# Altium PCB FBA_PCB.PcbDoc
Units mil, origin at the board's own origin, x right, y up, seen from the top; angles counter-clockwise.
Board outline 3031.5 x 2480.31 mil, 2 copper layers (Top Layer, Bottom Layer); 1 components, 3 nets, 15 pads, 0 vias.
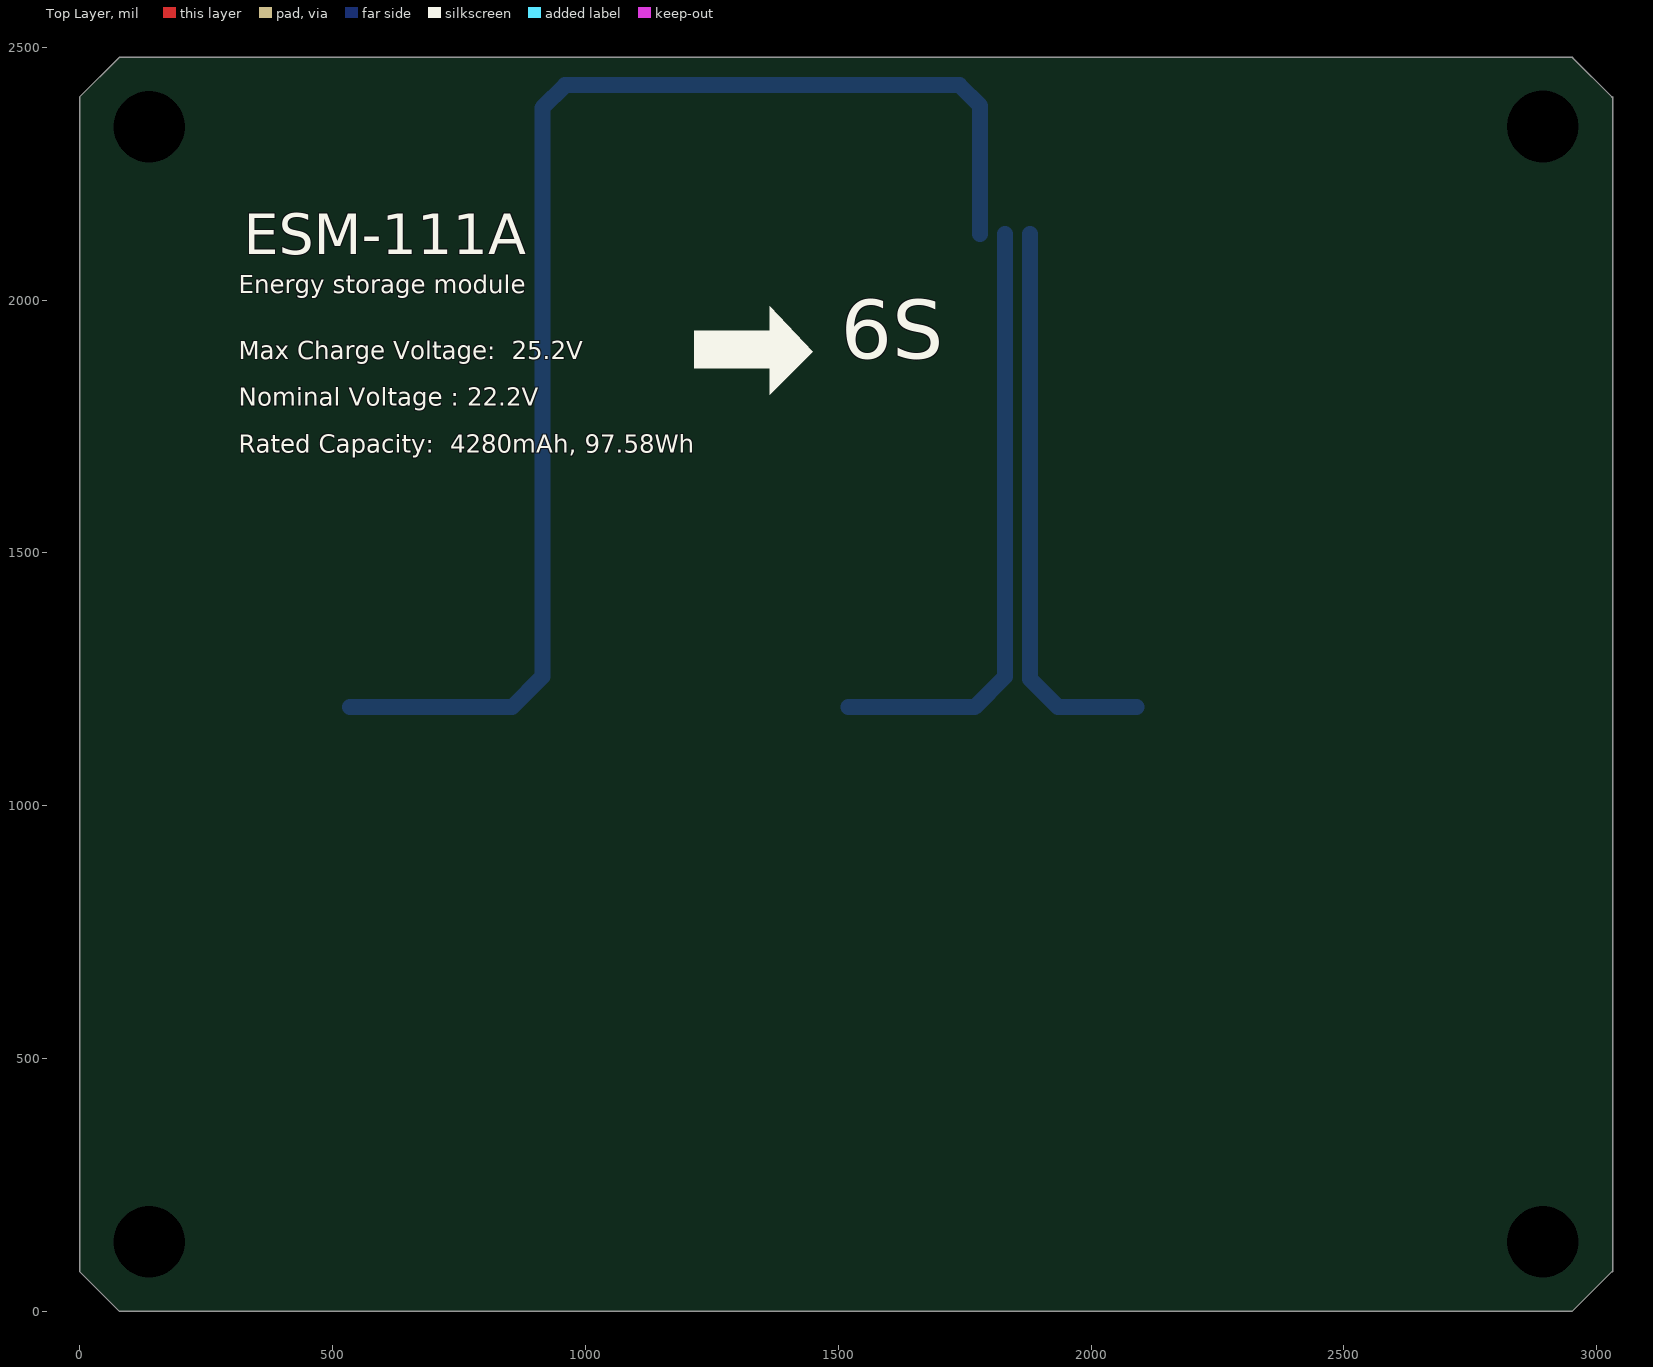
[diagram p0: Top Layer view]
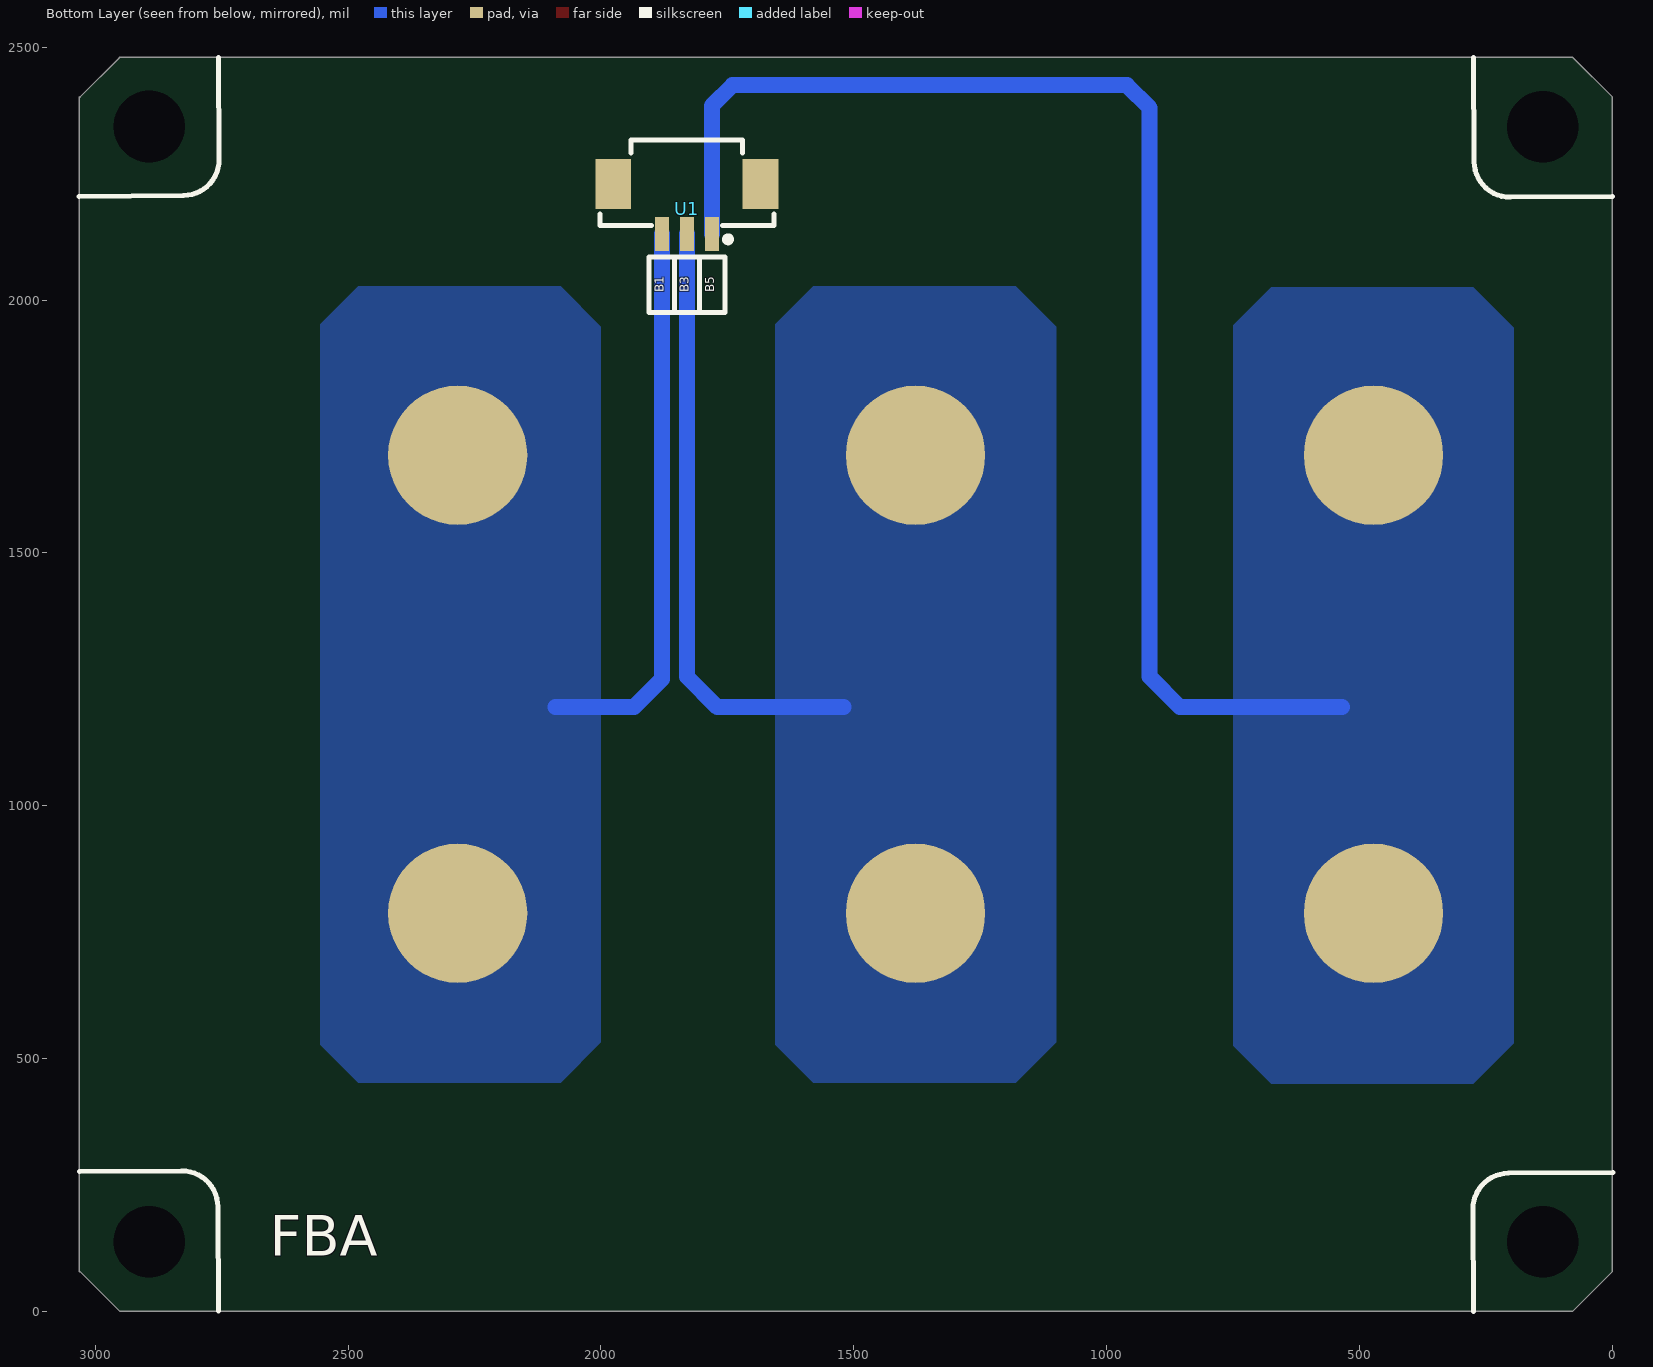
[diagram p1: Bottom Layer view, seen from below]

## Layer stack, top to bottom
Top Solder: solder mask 0.4, Solder Resist, Dk 3.5
Top Layer: signal copper 1.4
Dielectric 1: dielectric 12.6, FR-4, Dk 4.8
Bottom Layer: signal copper 1.4
Bottom Solder: solder mask 0.4, Solder Resist, Dk 3.5

## Board outline
0,78.74 78.74,0 2951.26,0 3030,78.74 3031.5,78.74 3031.5,2401.57 3030,2401.26 2951.26,2480 2952.76,2480.31 78.74,2480.31 78.74,2480 0,2401.26

## Design rules (kind name [scope] priority, off if disabled: settings)
Clearance [All] p1: gap=10 ignorepadtopadclearanceinfootprint=FALSE
PolygonConnect [All] p1: connectstyle=Direct reliefconductorwidth=10 reliefentries=4 polygonreliefangle="90 Angle" airgapwidth=10
RoutingVias [All] p1: holewidth=28 width=50 viastyle="Through Hole" minholewidth=28 minwidth=50 maxholewidth=28 maxwidth=50
SolderMaskExpansion [All] p1: expansion=4 istentingtop=FALSE
Width [All] p1: maxlimit=31.5 minlimit=10 preferedwidth=10
30 further rules are at their usual default settings.

## Components (designator, comment, footprint, x,y, rotation, side; value= is the part's Value field where it differs from the comment)
U1 "ZX-MX1.25-3PWT" CONN-SMD_3P-P1.25_MEGASTAR_ZX-MX1.25-3PWT 1830,2180 r0 bottom

## Footprints (in the part's own frame and the unit in brackets; to place one, negate y for a bottom-side part, rotate by r counter-clockwise, add the part's x,y. Pads: shape width x height; smd on the part's side, far side on the other; paste and mask are expansions set on the pad)
CONN-SMD_3P-P1.25_MEGASTAR_ZX-MX1.25-3PWT [mm]
  rect 0.7x1.7 smd paste+0 mask+0.05: 1(-1.25,1.25) 2(0,1.25) 3(1.25,1.25)
  rect 1.8x2.5 smd paste+0 mask+0.05: 4(-3.7,-1.25) 5(3.7,-1.25)
  silkscreen extent -4.37,-3.47 4.37,1.67

## Part data
U1: library part CMP-010-000000-1, Color=Beige, Current Rating=1A, Flame Retardant Rating=-, JLCPCB Part Class="Extended Part", LCSC Part Name="1x3P 间距:1.25mm 卧贴 系列:PicoBlade(MX 1.25)", Manufacturer=Megastar(兆星), Operating Temperature=-25℃~+85℃, Voltage Rating=125V, Add into BOM=yes, Contact Material=Brass, Contact Plating=Tin, Convert to PCB=yes, Datasheet=https://item.szlcsc.com/datasheet/ZX-MX1.25-3PWT/8430338.html, Design Item ID=ZX-MX1.25-3PWT, Device=ZX-MX1.25-3PWT, Manufacturer Part=ZX-MX1.25-3PWT, Mounting Type="Surface Mount, Right Angle", Number of Pins=3P, Number of PINs Per Row=3, Number of Rows=1, Pins Structure=1x3P, Pitch=1.25mm, Plastic Material=LCP, Reference Series="PicoBlade(MX 1.25)", Row Spacing=-, Source=FBA.SchLib, Supplementary Features="Auxiliary Solder Pin", Supplier Footprint=SMD,P=1.25mm,卧贴, Supplier Part=C7430469, Symbol=ZX-MX1.25-3PWT, X-Length of Bottom Edge on Board (Spacing Line)=8.75mm, Y-Width of Bottom Edge on Board=5.25mm, Z-Height of the Board=3.6mm

## Free pads (board coordinates)
  round 275.59 smd far side paste-7.07: 1(472.44,787.4) 1(472.44,1692.91) 1(1377.95,787.4) 1(1377.95,1692.91) 1(2283.46,787.4) 1(2283.46,1692.91)
  round 0 hole 141.73 unplated mask+0: 7(137.8,137.8) 7(137.8,2342.52) 7(2893,137.8) 7(2893,2343)

## Nets (pads, with @x,y where several pads share a name; then routed paths per layer and width w, separated by ;. In a path a pad name is that pad's centre, name@x,y a point inside that pad or via, vN(x,y) a via of type N, cw(c..) or ccw(c..) an arc to the next point about the centre after c; other vN are vias at no path point)
NetU1_1: pad.1@472.44,787.4 pad.1@472.44,1692.91 U1.1 | length 2684.6
  Bottom Layer w31.5: 535,1195 855,1195 915,1255 915,2380 960,2425 1740,2425 1780.78,2384.22 U1.1
NetU1_2: pad.1@1377.95,787.4 pad.1@1377.95,1692.91 U1.2 | length 1210.6
  Bottom Layer w31.5: 1520,1195 1770,1195 1829.99,1254.99 U1.2
NetU1_3: pad.1@2283.46,787.4 pad.1@2283.46,1692.91 U1.3 | length 1113.9
  Bottom Layer w31.5: U1.3 1879.2,1250.8 1935,1195 2090,1195
pads on no net: U1.4 U1.5

## Polygon pours and split planes (outlines as drawn)
NetU1_3 on Bottom Layer "NETU1_3_L02_P002" (solid, remove dead copper, pour order 2): 2480,452.5 2555,527.5 2555,1952.5 2480,2027.5 2080,2027.5 2000,1947.5 2000,532.5 2080,452.5
NetU1_2 on Bottom Layer "NETU1_2_L02_P001" (solid, remove dead copper, pour order 1): 1580,452.5 1655,527.5 1655,1952.5 1580,2027.5 1180,2027.5 1100,1947.5 1100,532.5 1180,452.5
NetU1_1 on Bottom Layer "NETU1_1_L02_P000" (solid, remove dead copper, pour order 0): 675,450 750,525 750,1950 675,2025 275,2025 195,1945 195,530 275,450

## Silkscreen, mask and mechanical layers (free items; w line width, h text height)
Top Overlay:
  rectangle: 1215,1865 1380,1940
  region: 1365,1987.5 1365,1812.5 1450,1897.5
  text "ESM-111A" at 325,2090 h80
  text "Energy storage module" at 315,2001.32 h60
  text "Max Charge Voltage:  25.2V" at 315,1871.27 h60
  text "6S" at 1505,1845 h200
  text "Nominal Voltage : 22.2V" at 315,1779.02 h60
  text "Rated Capacity:  4280mAh, 97.58Wh" at 315,1686.27 h60
Bottom Overlay:
  lines w10: -1,275 205.43,273.31 cw(c204.89,202.47) 275.73,201.96 274.28,0 ; 0,2204.72 201.96,2203.27 ccw(c202.47,2274.11) 273.31,2273.57 275,2480 ; 2756,1 2757.69,207.43 cw(c2828.53,206.89) 2829.04,277.73 3031,276.28 ; 2756.72,2480 2755.27,2278.04 ccw(c2826.11,2277.53) 2825.57,2206.69 3032,2205 ; 1805,1975 1855,1975 ; 1805,1975 1805,2085 ; 1805,1975 1755,1975 1755,2085 1805,2085 ; 1805,1975 1805,2085 ; 1805,2085 1855,2085 ; 1855,1975 1905,1975 1905,2085 1855,2085 ; 1855,1975 1855,2085 ; 1855,1975 1855,2085
  text "B5" at 1770.33,2015 h30 r270
  text "B3" at 1820.33,2015 h30 r270
  text "B1" at 1870,2015 h30 r270
  text "FBA" at 2655,110 h80
Bottom Solder:
  rectangle: 2058.04,897.51 2143.04,1597.51
  rectangle: 2428.04,897.51 2513.04,1597.51
  rectangle: 2243.04,975.01 2328.04,1520.01
  rectangle: 1148.04,902.51 1233.04,1602.51
  rectangle: 1518.04,902.51 1603.04,1602.51
  rectangle: 1333.04,980.01 1418.04,1525.01
  rectangle: 430,975 515,1520
  rectangle: 615,897.5 700,1597.5
  rectangle: 245,897.5 330,1597.5
Mechanical 1:
  lines w10: 0,2401.26 78.74,2480 ; 0,2401.57 0,78.74 78.74,0 2952.76,0 ; 78.74,2480.31 2952.76,2480.31 ; 2951.26,0 3030,78.74 ; 2951.26,2480 3030,2401.26 ; 3031.5,78.74 3031.5,2401.57

## Dimensions
2893,2343 to 2822,2343 on Mechanical 6
2893,2343 to 3031.5,2401.57 on Mechanical 6
2952.76,2480.31 to 78.74,2480.31 on Mechanical 6
3031.5,2401.57 to 0,2401.57 on Mechanical 6
3031.5,2401.57 to 3031.5,78.74 on Mechanical 6
2952.76,0 to 2952.76,2480.31 on Mechanical 6